# Altium PCB PCB1.PcbDoc
Units mm, origin at the board's own origin, x right, y up, seen from the top; angles counter-clockwise.
Board outline 34.1 x 40.1 mm, 2 copper layers (Top Layer, Bottom Layer); 19 components, 26 nets, 107 pads, 11 vias.
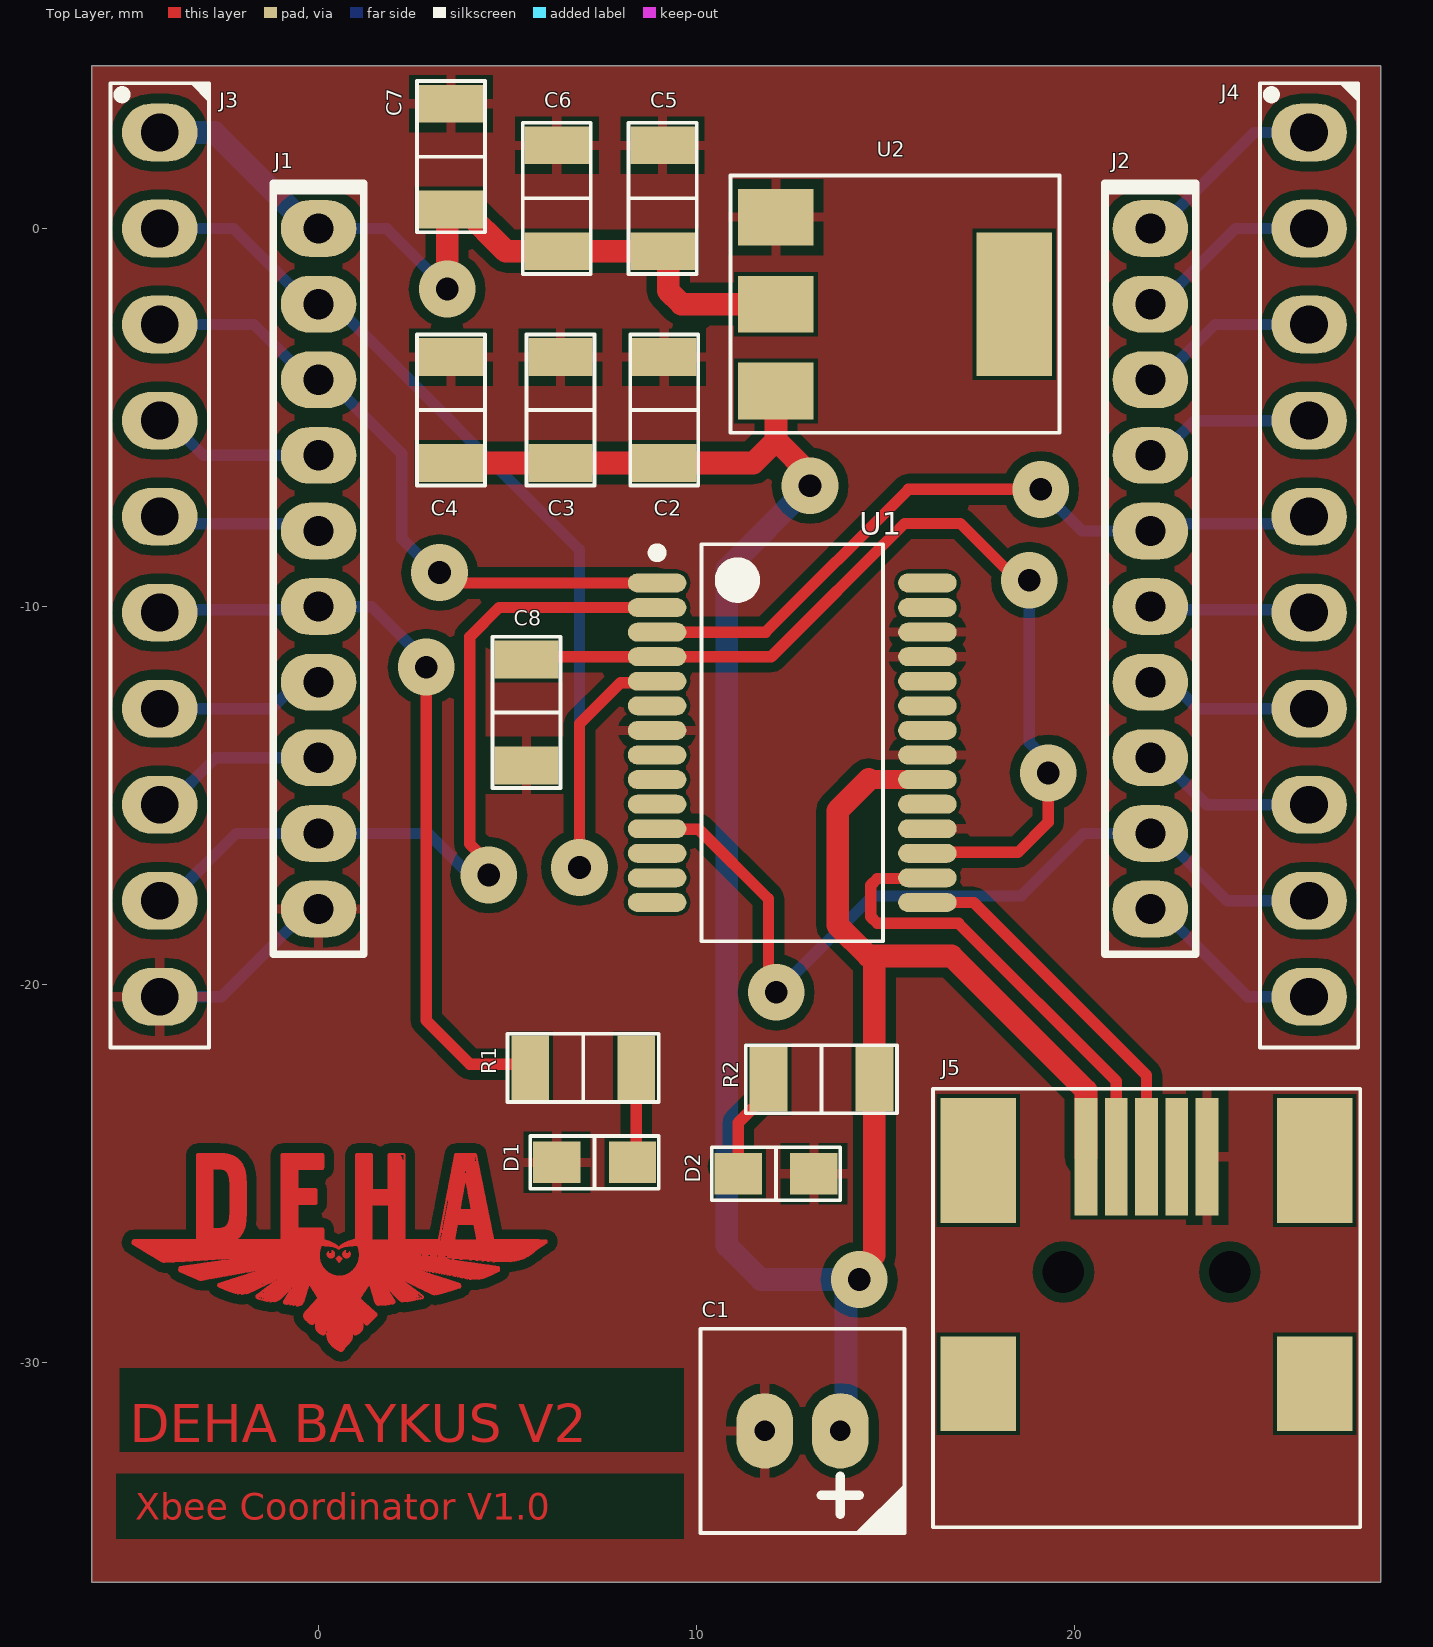
[diagram p0: Top Layer view]
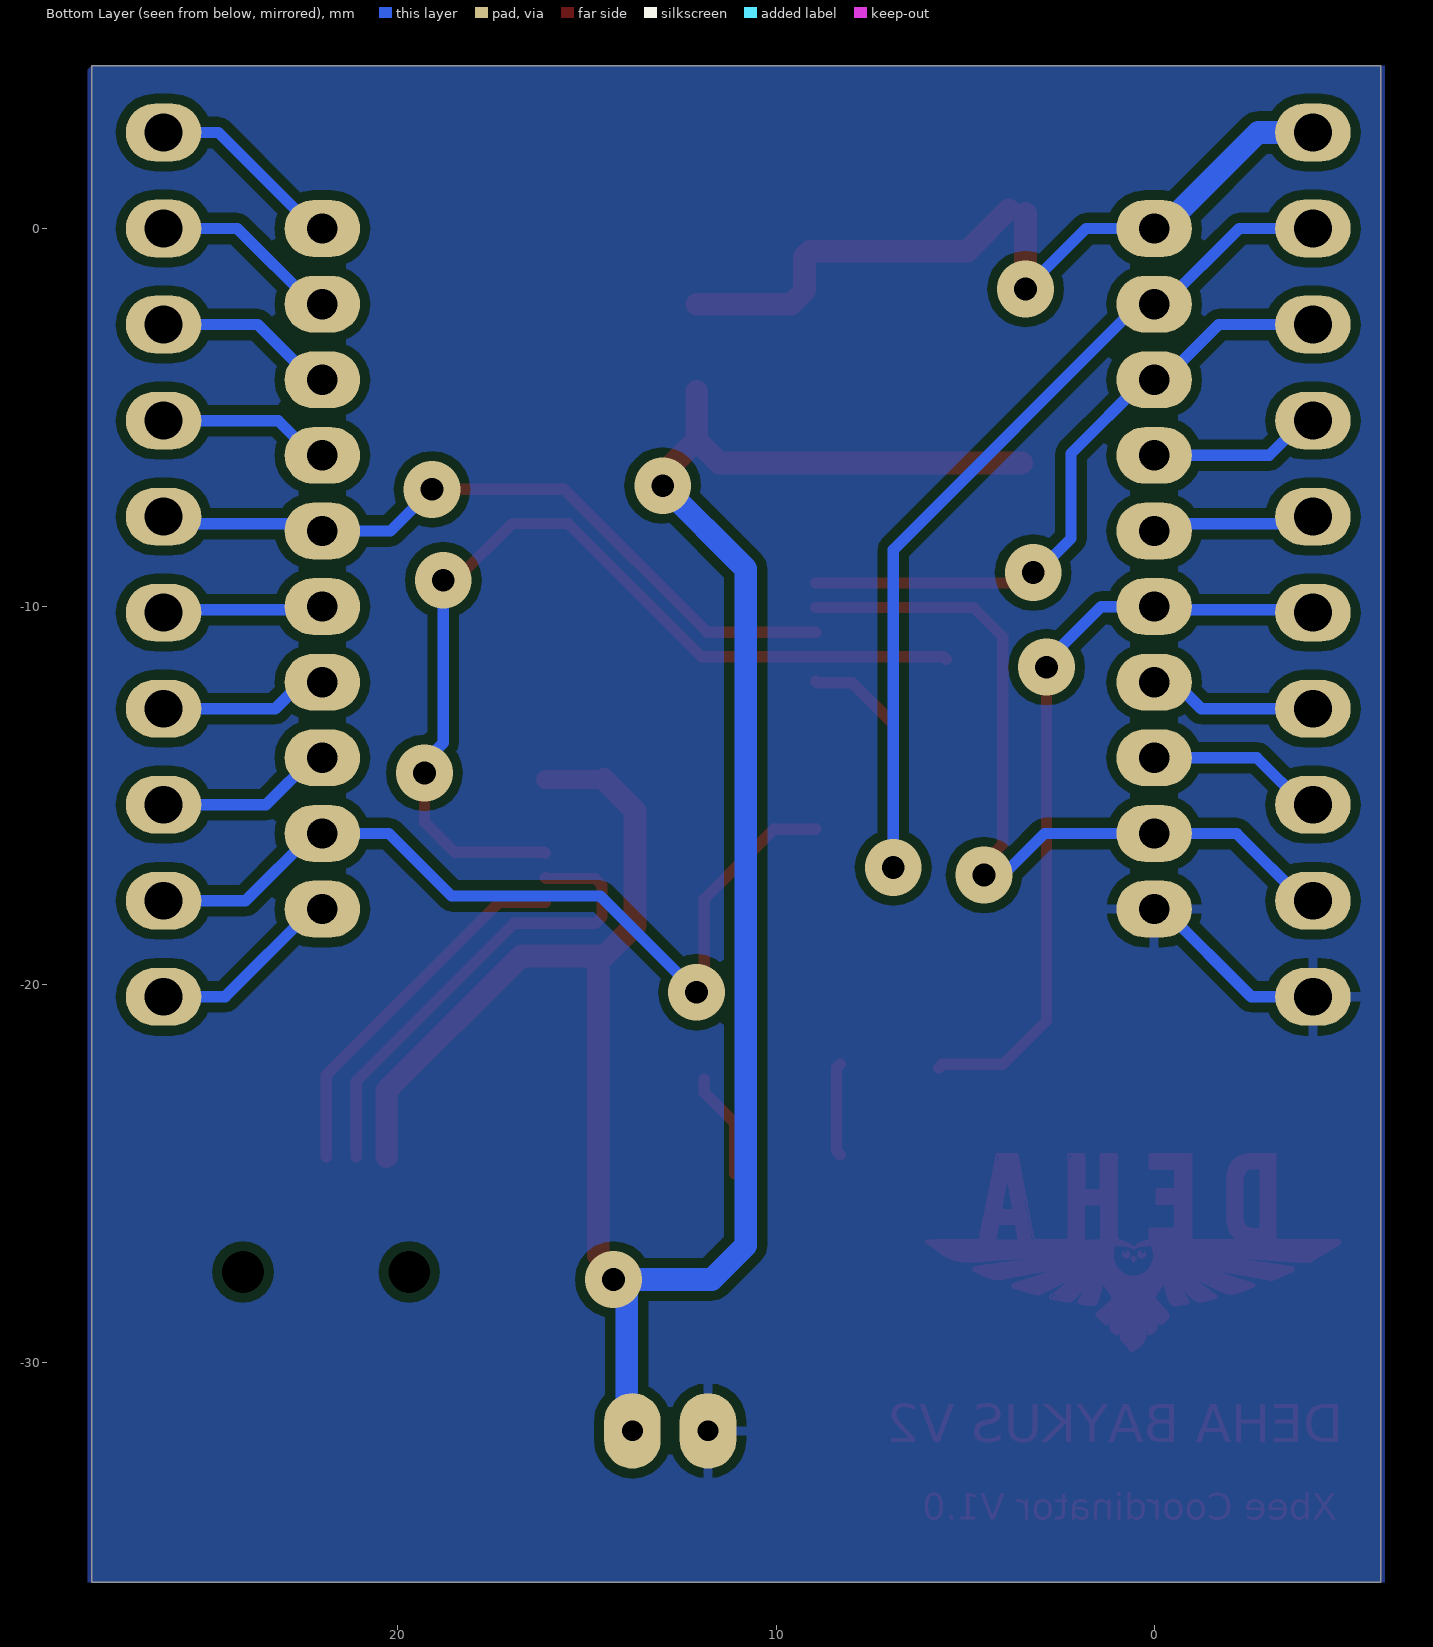
[diagram p1: Bottom Layer view, seen from below]
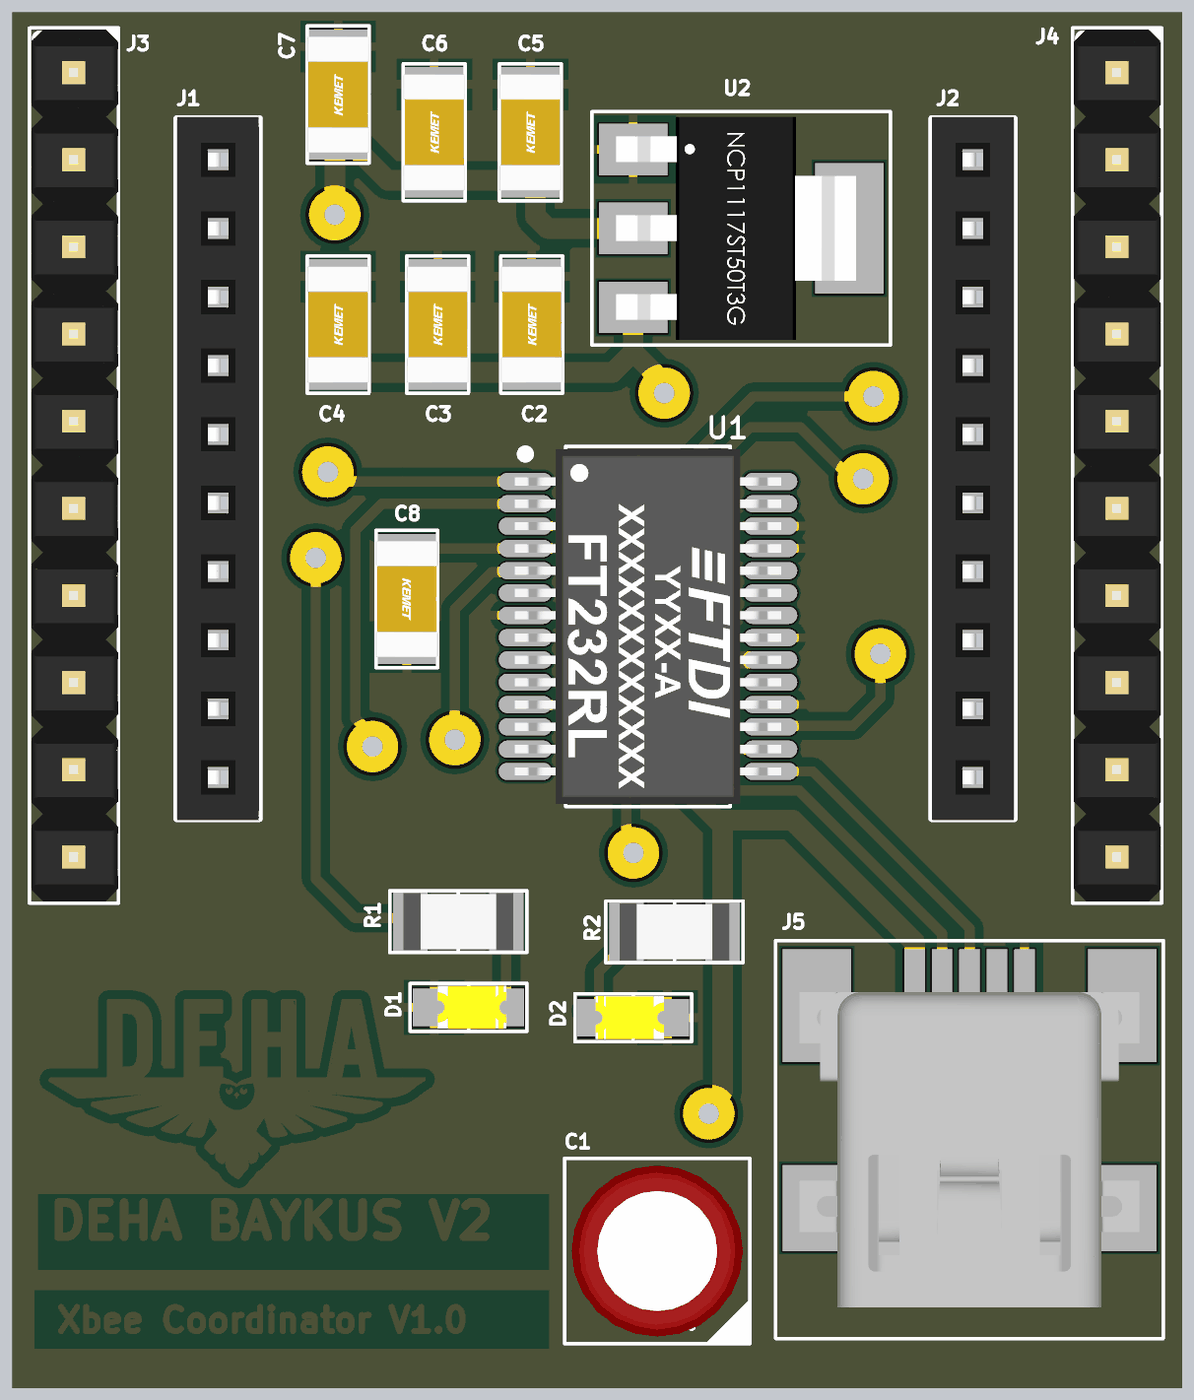
[diagram p2: 3D render of the assembled board from above, using the file's embedded part models]

## Layer stack, top to bottom
Top Solder: solder mask 0.0102, Solder Resist, Dk 3.5
Top Layer: signal copper 0.0356
Dielectric 1: dielectric 0.32, FR-4, Dk 4.8
Bottom Layer: signal copper 0.0356
Bottom Solder: solder mask 0.0102, Solder Resist, Dk 3.5

## Board outline
-6,-35.8 28.1,-35.8 28.1,4.3 -6,4.3

## Design rules (kind name [scope] priority, off if disabled: settings)
Clearance [All] p1: gap=0.254 ignorepadtopadclearanceinfootprint=FALSE except(0.1: Arc-SMDPad Track-SMDPad SMDPad-SMDPad SMDPad-THPad SMDPad-Via SMDPad-Fill SMDPad-Poly SMDPad-Region SMDPad-Text SMDPad-Hole)
PolygonConnect [All] p1: connectstyle=Relief reliefconductorwidth=0.254 reliefentries=4 polygonreliefangle="90 Angle" airgapwidth=0.254
RoutingVias [All] p1: holewidth=0.6 width=1.5 viastyle="Through Hole" minholewidth=0.5 minwidth=1 maxholewidth=1 maxwidth=2.54
SolderMaskExpansion [All] p1: expansion=0.102 istentingtop=FALSE
Width [All] p1: maxlimit=1 minlimit=0.254 preferedwidth=0.3 minimp=50.000000 maximp=50.000000 favimp=50.000000
30 further rules are at their usual default settings.

## Components (designator, comment, footprint, x,y, rotation, side; value= is the part's Value field where it differs from the comment)
C1 "10uF" "5x11 Radial Capacitor" 13.8,-31.8 r180 top
C2 "10uF" C_1206 9.142,-3.4 r180 top
C3 "1uF" C_1206 6.4,-3.4 r180 top
C4 "0.1uF" C_1206 3.5,-3.4 r180 top
C5 "0.1uF" C_1206 9.1,2.2 r180 top
C6 "1uF" C_1206 6.3,2.2 r180 top
C7 "10uF" C_1206 3.5,3.3 r180 top
C8 "0.1uF" C_1206 5.5,-14.2 r0 top
D1 "LED_0805" LED_0805 8.3,-24.7 r180 top
D2 "LED_0805" LED_0805 11.1,-25 r0 top
J1 "Header_1x10_2mm" "Header 1x10 2mm" 0,0 r270 top
J2 "Header_1x10_2mm" "Header 1x10 2mm" 22.001,0 r270 top
J3 "Pin_Header_1x10Pos_2.54mm" PinHeader_1x10Pin_2.54mm -4.2,2.54 r270 top
J4 "Pin_Header_1x10Pos_2.54mm" PinHeader_1x10Pin_2.54mm 26.2,2.54 r270 top
J5 "Mini_USB" Mini_USB 17.45,-30.55 r0 top
R1 "470" R_1206 5.6,-22.2 r270 top
R2 "1K" R_1206 14.7,-22.5 r90 top
U1 "FT232RL" SSOP-28Pin 12.529,-13.6 r0 top
U2 "NCP1117 3.3V" "NCP1117 3.3V" 12.097,0.3 r270 top

## Footprints (in the part's own frame and the unit in brackets; to place one, negate y for a bottom-side part, rotate by r counter-clockwise, add the part's x,y. Pads: shape width x height; smd on the part's side, far side on the other; paste and mask are expansions set on the pad)
"5x11 Radial Capacitor" [mm]
  oval 1.5x2 hole 0.55 mask+0.05: 1(0,0) 2(2,0)
  silkscreen extent -1.7,-2.7 3.7,2.7, body extent -1.5,-2.5 3.5,2.5, height 11.2
C_1206 [mm]
  rect 1.7x1 smd mask+0.02: 1(0,0) 2(0,2.8)
  silkscreen extent -0.9,-0.6 0.9,3.4, body extent -0.9,-0.3 0.9,3.1, height 0.88
"Header 1x10 2mm" [mm]
  oval 1.5x2 hole 0.8: 1(0,0) 2(2,0) 3(4,0) 4(6,0) 5(8,0) 6(10,0) 7(12,0) 8(14,0) 9(16,0) 10(18,0)
  silkscreen extent -1.2,-1.2 19.2,1.2, body extent -1.25,-1.2 19.25,1.2, height 4.41
LED_0805 [mm]
  rect 1.25x1.1 smd mask+0.05: 1(0,0) 2(2,0)
  silkscreen extent -0.7,-0.7 2.7,0.7, body extent -0.1,-0.62 1.9,0.62, height 1.1
Mini_USB [mm]
  rect 0.6x3.1 smd mask+0.05: 1(2.85,6) 2(3.65,6) 3(4.45,6) 4(5.25,6) 5(6.05,6)
  rect 2x2.5 smd mask+0.05: ""(0,0) ""(8.9,0)
  rect 2x3.3 smd mask+0.05: ""(0,5.9) ""(8.9,5.9)
  round 1 hole 1.1 mask+0.02: ""(2.25,2.95) ""(6.65,2.95)
  silkscreen extent -1.2,-3.8 10.1,7.8, body extent -0.5,-2.9 9.4,6.3, height 4.14
"NCP1117 3.3V" [mm]
  rect 1.5x2 smd mask+0.05: 1(0,0) 2(2.3,0) 3(4.6,0)
  rect 3.8x2 smd mask+0.05: ""(2.3,6.3)
  silkscreen extent -1.1,-1.2 5.7,7.5, body extent -0.95,-0.5 5.55,6.5, height 1.73
PinHeader_1x10Pin_2.54mm [mm]
  oval 1.524x2 hole 1: 1(0,0) 2(2.54,0) 3(5.08,0) 4(7.62,0) 5(10.16,0) 6(12.7,0) 7(15.24,0) 8(17.78,0) 9(20.32,0) 10(22.86,0)
  silkscreen extent -1.3,-1.3 24.2,2.1, body extent -1.25,-1.26 24.15,1.28, height 9.4
R_1206 [mm]
  rect 1.7x1 smd mask+0.02: 1(0,0) 2(0,2.8)
  silkscreen extent -0.9,-0.6 0.9,3.4, body extent -0.83,-0.2 0.83,3, height 0.63
SSOP-28Pin [mm] "SOP, 28-Leads, Body 10,28x5,30mm, Pitch 0,65mm, IPC Medium Density"
  oval 1.55x0.5 smd mask+0.05: 1(-3.575,4.225) 2(-3.575,3.575) 3(-3.575,2.925) 4(-3.575,2.275) 5(-3.575,1.625) 6(-3.575,0.975) 7(-3.575,0.325) 8(-3.575,-0.325) 9(-3.575,-0.975) 10(-3.575,-1.625) 11(-3.575,-2.275) 12(-3.575,-2.925) 13(-3.575,-3.575) 14(-3.575,-4.225) 15(3.575,-4.225) 16(3.575,-3.575) 17(3.575,-2.925) 18(3.575,-2.275) 19(3.575,-1.625) 20(3.575,-0.975) 21(3.575,-0.325) 22(3.575,0.325) 23(3.575,0.975) 24(3.575,1.625) 25(3.575,2.275) 26(3.575,2.925) 27(3.575,3.575) 28(3.575,4.225)
  silkscreen extent -3.7,-5.25 2.4,5.25, body extent -3.88,-5.16 3.88,5.17, height 2.16

## Part data
C1: library part Cap_Pol_5x11, "5x11 Radial Polarized Capacitor"
C2 C3 C4 C5 C6 C7 C8: library part C_1206(3216), "1206(3216) package capacitor"
R1 R2: library part R_1206(3216), "1206(3216) package resistor"
U1: "FT232RL_USB-Converter"
U2: "NCP1117-3.3V Linear Regulator"

## Via types
v1: diameter 1.5, hole 0.6, Top Layer to Bottom Layer, 11 vias

## Nets (pads, with @x,y where several pads share a name; then routed paths per layer and width w, separated by ;. In a path a pad name is that pad's centre, name@x,y a point inside that pad or via, vN(x,y) a via of type N, cw(c..) or ccw(c..) an arc to the next point about the centre after c; other vN are vias at no path point)
CTS: J2.9 J4.9 U1.11 | length 22.8
  Top Layer w0.3: U1.11 8.967,-15.887 10.057,-15.887 11.9,-17.73 11.9,-19.996 v1(12.104,-20.2)
  Bottom Layer w0.3: v1(12.104,-20.2) 14.65,-17.654 18.582,-17.654 20.236,-16 22.251,-16 24.031,-17.78 J4.9
DIO0: J2.1 J4.1 | length 5.3
  Bottom Layer w0.3: J2.1 22.21,0 24.75,2.54 J4.1
DIO1: J2.2 J4.2 | length 5
  Bottom Layer w0.3: J2.2 22.251,-2 24.251,0 J4.2
DIO2: J2.3 J4.3 | length 4.8
  Bottom Layer w0.3: J2.3 22.251,-4 23.711,-2.54 J4.3
DIO3: J2.4 J4.4 | length 4.6
  Bottom Layer w0.3: J2.4 22.251,-6 23.171,-5.08 J4.4
DIO4: J2.10 J4.10 | length 5.2
  Bottom Layer w0.3: J2.10 22.251,-18 24.571,-20.32 J4.10
DIO5: J2.6 J4.6 | length 4.3
  Bottom Layer w0.3: J2.6 22.081,-10.08 26.12,-10.08 J4.6
DIO9: J2.8 J4.8 | length 4.7
  Bottom Layer w0.3: J2.8 22.251,-14 23.491,-15.24 J4.8
DIO11: J1.7 J3.7 | length 4.5
  Bottom Layer w0.3: J3.7 -1.247,-12.7 -0.547,-12 J1.7
DIO12: J1.4 J3.4 | length 4.6
  Bottom Layer w0.3: J3.4 -3.962,-5.08 -3.042,-6 -0.1,-6 J1.4
DTR: J1.9 J3.9 U1.2 | length 21.7
  Top Layer w0.3: v1(4.5,-17.1) 4.5,-16.775 4,-16.275 4,-10.8 4.775,-10.025 U1.2
  Bottom Layer w0.3: J3.9 -3.962,-17.78 -2.182,-16 J1.9 2.9,-16 4,-17.1 v1(4.5,-17.1)
GND: C1.2 C2.1 C3.1 C4.1 C5.1 C6.1 C7.1 C8.1 D1.2 D2.2 J1.10 J3.10 J5.5 U1.7 U1.18 U1.21 U1.25 U1.26 U2.1 | length 5.2
  Bottom Layer w0.3: J3.10 -2.57,-20.32 -0.25,-18 J1.10
NetC8_2: C8.2 U1.4 U1.17 | length 25.6
  Top Layer w0.3: C8.2 5.575,-11.325 U1.4 11.975,-11.325 15.5,-7.8 16.975,-7.8 18.475,-9.3 v1(18.8,-9.3) ; U1.17 16.129,-16.5 18.5,-16.5 19.3,-15.7 v1(19.3,-14.4)
  Bottom Layer w0.3: v1(18.8,-9.3) 18.8,-13.6 19.3,-14.1 v1(19.3,-14.4)
NetD1_1: D1.1 R1.2 | length 2.5
  Top Layer w0.3: D1.1@8.3,-24.5 8.4,-24.4 R1.2 R1.2@8.3,-22.1
NetD2_1: D2.1 R2.2 | length 3
  Top Layer w0.3: D2.1@10.7,-24.8 D2.1@10.8,-24.9 ; D2.1 11.1,-23.65 11.9,-22.85 R2.2
RES: J1.8 J3.8 | length 4.7
  Bottom Layer w0.3: J3.8 -3.962,-15.24 -2.722,-14 J1.8
RSSI: J1.6 J3.6 R1.1 | length 20.6
  Top Layer w0.3: v1(2.846,-11.6) 2.846,-20.946 4,-22.1 5.6,-22.1 R1.1@5.7,-22.2
  Bottom Layer w0.3: J3.6 -4.12,-10.08 -0.08,-10.08 J1.6 1.4,-10 2.846,-11.446 v1(2.846,-11.6)
RST: J1.5 J3.5 | length 4.4
  Bottom Layer w0.3: J3.5 -4.01,-7.81 -0.19,-7.81 J1.5
RTS: J2.5 J4.5 U1.3 | length 19.4
  Top Layer w0.3: U1.3 11.825,-10.675 15.6,-6.9 v1(19.1,-6.9)
  Bottom Layer w0.3: v1(19.1,-6.9) 20.2,-8 J2.5 22.191,-7.81 26.01,-7.81 J4.5
RX: J1.3 J3.3 U1.1 | length 17.3
  Top Layer w0.3: v1(3.2,-9.1) 3.525,-9.1 3.8,-9.375 U1.1
  Bottom Layer w0.3: J3.3 -1.71,-2.54 -0.25,-4 J1.3 0.25,-4 2.2,-5.95 2.2,-8.2 3.1,-9.1 v1(3.2,-9.1)
TX: J1.2 J3.2 U1.5 | length 29.3
  Top Layer w0.3: v1(6.9,-16.9) 6.9,-13.1 7.987,-12.013 8.916,-12.013 U1.5
  Bottom Layer w0.3: J3.2 -2.25,0 -0.25,-2 0.4,-2 6.9,-8.5 v1(6.9,-16.9)
USBDM: J5.2 U1.16 | length 12.7
  Top Layer w0.3: U1.16 16.086,-17.193 14.779,-17.193 14.604,-17.369 14.604,-18.203 14.779,-18.379 16.929,-18.379 21.1,-22.55 J5.2
USBDP: J5.3 U1.15 | length 9.8
  Top Layer w0.3: U1.15 17.329,-17.825 21.9,-22.396 J5.3
VBUS: C1.1 C2.2 C3.2 C4.2 J5.1 R2.1 U1.20 U2.3 | length 65.3
  Top Layer w0.5: 14.551,-14.575 U1.20
  Top Layer w0.6: C4.2 C3.2 C2.2 11.5,-6.2 12.097,-5.603 12.097,-5.597 ; U2.3 12.097,-5.597 ; v1(13,-6.8) 13,-6.5 12.097,-5.597 ; v1(14.3,-27.8) 14.3,-27.556 14.7,-27.156 R2.1 14.7,-19.4 ; 14.551,-14.575 13.728,-15.398 13.728,-18.428 14.541,-19.242 16.742,-19.242 20.3,-22.8 J5.1
  Bottom Layer w0.6: v1(13,-6.8) 10.8,-9 10.8,-26.9 11.7,-27.8 v1(14.3,-27.8) 13.95,-28.15 13.95,-31.65 C1.1
VDD: C5.2 C6.2 C7.2 J1.1 J3.1 U2.2 | length 21.8
  Top Layer w0.3: C7.2@3.4,0.4 C7.2 C7.2@3.85,0.5
  Top Layer w0.6: C7.2@3.4,0.4 v1(3.4,-1.6) v1@3.5,-1.5 ; C7.2@3.85,0.5 4.95,-0.6 C6.2 C5.2 9.249,-0.749 9.249,-1.649 9.6,-2 U2.2
  Bottom Layer w0.3: J1.1@-0.21,0 J1.1 1.8,0 v1(3.4,-1.6)
  Bottom Layer w0.6: J3.1 -2.75,2.54 J1.1@-0.21,0
VREF: J2.7 J4.7 | length 4.5
  Bottom Layer w0.3: J2.7 22.548,-12 23.248,-12.7 J4.7
pads on no net: J5. J5.4 U1.6 U1.8 U1.9 U1.10 U1.12 U1.13 U1.14 U1.19 U1.22 U1.23 U1.24 U1.27 U1.28 U2.

## Polygon pours and split planes (outlines as drawn)
GND on Top Layer "GND_L01_P000" (solid, pour order 0): -6,4.3 28.1,4.3 28.1,-35.8 -6,-35.8
GND on Bottom Layer "GND_L02_P001" (solid, pour order 1): 28.1,4.3 28.2,4.2 28.2,-35.8 -6.1,-35.8 -6.1,4.3

## Other copper
Top Layer:
  region: 203 vertices and 0 holes, not listed, extent 0.221,-27.236 0.433,-27.024
  region: 171 vertices and 0 holes, not listed, extent 0.457,-27.356 0.628,-27.165
  region: 206 vertices and 0 holes, not listed, extent 0.632,-27.236 0.847,-27.024
  region: 11314 vertices and 128 holes, not listed, extent -4.944,-29.713 6.054,-24.456
  text "DEHA BAYKUS V2" at -5,-32.1 h1
  text "Xbee Coordinator V1.0" at -4.846,-34.146 h0.7